# EAGLE board CT_schematic (EAGLE 7.6.0)

Size 100 x 80 mm. Coordinates in mm from the lower left corner, seen from the top.
Outline: 0,0 100,0 100,80 0,80 0,0
Copper layers (1*16): Top 0.035mm / dielectric 1.5mm / Bottom 0.035mm
Design rules "default": minimum track width 10mil, minimum drill 24mil, track to track 8mil, track to pad 8mil, pad to pad 8mil, via to via 8mil, smd to smd 8mil, copper to edge 40mil, drill to drill 8mil, minimum pad ring 10mil, minimum via ring 8mil, stop-mask expansion 4mil, vias tented up to drill 0mil, thermal gap 10mil

## Footprints (pad centres in the part's own frame; a part is rotated, then mirrored left to right if it is on the bottom)
C0603 = smd 0.8 x 0.8: 1 -0.762,0; 2 0.762,0
C0402 = smd 0.5 x 0.5: 1 -0.508,0; 2 0.508,0
C0805 = smd 1.2 x 1.3: 1 -1.016,0; 2 1.016,0
C1210 = smd 1.2 x 2.5: 1 -1.524,0; 2 1.524,0
EXV-9H = smd 3.505 x 1.676: 1 -2.857,0; 2 2.857,0
L0603 = smd 0.8 x 0.8: 1 -0.762,0; 2 0.762,0
PJ-037B_PACKAGE = drill 3.7 square: 1 12,0 | drill 3.2 square: 2 6,0
R0603 = smd 0.8 x 0.8: 1 -0.762,0; 2 0.762,0
LQFP176 = smd 0.3 x 1.2: 1 -10.75,-12.75; 2 -10.25,-12.75; 3 -9.75,-12.75; 4 -9.25,-12.75; 5 -8.75,-12.75; 6 -8.25,-12.75; 7 -7.75,-12.75; 8 -7.25,-12.75; 9 -6.75,-12.75; 10 -6.25,-12.75; 11 -5.75,-12.75; 12 -5.25,-12.75; 13 -4.75,-12.75; 14 -4.25,-12.75; 15 -3.75,-12.75; 16 -3.25,-12.75; 17 -2.75,-12.75; 18 -2.25,-12.75; 19 -1.75,-12.75; 20 -1.25,-12.75; 21 -0.75,-12.75; 22 -0.25,-12.75; 23 0.25,-12.75; 24 0.75,-12.75; 25 1.25,-12.75; 26 1.75,-12.75; 27 2.25,-12.75; 28 2.75,-12.75; 29 3.25,-12.75; 30 3.75,-12.75; 31 4.25,-12.75; 32 4.75,-12.75; 33 5.25,-12.75; 34 5.75,-12.75; 35 6.25,-12.75; 36 6.75,-12.75; 37 7.25,-12.75; 38 7.75,-12.75; 39 8.25,-12.75; 40 8.75,-12.75; 41 9.25,-12.75; 42 9.75,-12.75; 43 10.25,-12.75; 44 10.75,-12.75; 89 10.75,12.75; 90 10.25,12.75; 91 9.75,12.75; 92 9.25,12.75; 93 8.75,12.75; 94 8.25,12.75; 95 7.75,12.75; 96 7.25,12.75; 97 6.75,12.75; 98 6.25,12.75; 99 5.75,12.75; 100 5.25,12.75; 101 4.75,12.75; 102 4.25,12.75; 103 3.75,12.75; 104 3.25,12.75; 105 2.75,12.75; 106 2.25,12.75; 107 1.75,12.75; 108 1.25,12.75; 109 0.75,12.75; 110 0.25,12.75; 111 -0.25,12.75; 112 -0.75,12.75; 113 -1.25,12.75; 114 -1.75,12.75; 115 -2.25,12.75; 116 -2.75,12.75; 117 -3.25,12.75; 118 -3.75,12.75; 119 -4.25,12.75; 120 -4.75,12.75; 121 -5.25,12.75; 122 -5.75,12.75; 123 -6.25,12.75; 124 -6.75,12.75; 125 -7.25,12.75; 126 -7.75,12.75; 127 -8.25,12.75; 128 -8.75,12.75; 129 -9.25,12.75; 130 -9.75,12.75; 131 -10.25,12.75; 132 -10.75,12.75 | smd 1.2 x 0.3: 45 12.75,-10.75; 46 12.75,-10.25; 47 12.75,-9.75; 48 12.75,-9.25; 49 12.75,-8.75; 50 12.75,-8.25; 51 12.75,-7.75; 52 12.75,-7.25; 53 12.75,-6.75; 54 12.75,-6.25; 55 12.75,-5.75; 56 12.75,-5.25; 57 12.75,-4.75; 58 12.75,-4.25; 59 12.75,-3.75; 60 12.75,-3.25; 61 12.75,-2.75; 62 12.75,-2.25; 63 12.75,-1.75; 64 12.75,-1.25; 65 12.75,-0.75; 66 12.75,-0.25; 67 12.75,0.25; 68 12.75,0.75; 69 12.75,1.25; 70 12.75,1.75; 71 12.75,2.25; 72 12.75,2.75; 73 12.75,3.25; 74 12.75,3.75; 75 12.75,4.25; 76 12.75,4.75; 77 12.75,5.25; 78 12.75,5.75; 79 12.75,6.25; 80 12.75,6.75; 81 12.75,7.25; 82 12.75,7.75; 83 12.75,8.25; 84 12.75,8.75; 85 12.75,9.25; 86 12.75,9.75; 87 12.75,10.25; 88 12.75,10.75; 133 -12.75,10.75; 134 -12.75,10.25; 135 -12.75,9.75; 136 -12.75,9.25; 137 -12.75,8.75; 138 -12.75,8.25; 139 -12.75,7.75; 140 -12.75,7.25; 141 -12.75,6.75; 142 -12.75,6.25; 143 -12.75,5.75; 144 -12.75,5.25; 145 -12.75,4.75; 146 -12.75,4.25; 147 -12.75,3.75; 148 -12.75,3.25; 149 -12.75,2.75; 150 -12.75,2.25; 151 -12.75,1.75; 152 -12.75,1.25; 153 -12.75,0.75; 154 -12.75,0.25; 155 -12.75,-0.25; 156 -12.75,-0.75; 157 -12.75,-1.25; 158 -12.75,-1.75; 159 -12.75,-2.25; 160 -12.75,-2.75; 161 -12.75,-3.25; 162 -12.75,-3.75; 163 -12.75,-4.25; 164 -12.75,-4.75; 165 -12.75,-5.25; 166 -12.75,-5.75; 167 -12.75,-6.25; 168 -12.75,-6.75; 169 -12.75,-7.25; 170 -12.75,-7.75; 171 -12.75,-8.25; 172 -12.75,-8.75; 173 -12.75,-9.25; 174 -12.75,-9.75; 175 -12.75,-10.25; 176 -12.75,-10.75
10100565 = smd 0.8 x 2.35: 1 0,0; 2 1.25,0; 3 2.55,0; 4 4.25,0; 5 5.43,0; 6 6.68,0; 7 7.93,0; 8 9.18,0; 9 11.67,0; 10 14.18,0; 11 15.43,0; 12 16.68,0; 13 17.93,0; 14 19.18,0; 15 21.68,0 | smd 1.5 x 3.1: 16 23.495,-1.375; 20 25.685,-22.875 | smd 1.55 x 3.1: 17 -1.815,-1.375; 21 -1.815,-22.875 | drill 1.1 pad 1.1: 18 21.68,-2.375; 19 0.68,-2.375
HTQFP-64-EXP = smd 1.5 x 0.3: 1 -5.7,3.75; 2 -5.7,3.25; 3 -5.7,2.75; 4 -5.7,2.25; 5 -5.7,1.75; 6 -5.7,1.25; 7 -5.7,0.75; 8 -5.7,0.25; 9 -5.7,-0.25; 10 -5.7,-0.75; 11 -5.7,-1.25; 12 -5.7,-1.75; 13 -5.7,-2.25; 14 -5.7,-2.75; 15 -5.7,-3.25; 16 -5.7,-3.75; 33 5.7,-3.75; 34 5.7,-3.25; 35 5.7,-2.75; 36 5.7,-2.25; 37 5.7,-1.75; 38 5.7,-1.25; 39 5.7,-0.75; 40 5.7,-0.25; 41 5.7,0.25; 42 5.7,0.75; 43 5.7,1.25; 44 5.7,1.75; 45 5.7,2.25; 46 5.7,2.75; 47 5.7,3.25; 48 5.7,3.75 | smd 0.3 x 1.5: 17 -3.75,-5.7; 18 -3.25,-5.7; 19 -2.75,-5.7; 20 -2.25,-5.7; 21 -1.75,-5.7; 22 -1.25,-5.7; 23 -0.75,-5.7; 24 -0.25,-5.7; 25 0.25,-5.7; 26 0.75,-5.7; 27 1.25,-5.7; 28 1.75,-5.7; 29 2.25,-5.7; 30 2.75,-5.7; 31 3.25,-5.7; 32 3.75,-5.7; 49 3.75,5.7; 50 3.25,5.7; 51 2.75,5.7; 52 2.25,5.7; 53 1.75,5.7; 54 1.25,5.7; 55 0.75,5.7; 56 0.25,5.7; 57 -0.25,5.7; 58 -0.75,5.7; 59 -1.25,5.7; 60 -1.75,5.7; 61 -2.25,5.7; 62 -2.75,5.7; 63 -3.25,5.7; 64 -3.75,5.7 | smd 8 x 8: EXP 0,0 | drill 0.2 pad 0.3: P$9 3.25,3.25; P$10 1.95,3.25; P$11 0.65,3.25; P$12 -0.65,3.25; P$13 -1.95,3.25; P$14 -3.25,3.25; P$15 -3.25,1.95; P$16 -1.95,1.95; P$17 -0.65,1.95; P$18 0.65,1.95; P$19 1.95,1.95; P$20 3.25,1.95; P$24 3.25,0.65; P$25 3.25,-0.65; P$26 1.95,0.65; P$27 1.95,-0.65; P$28 0.65,0.65; P$29 0.65,-0.65; P$30 -0.65,0.65; P$31 -0.65,-0.65; P$32 -1.95,0.65; P$33 -1.95,-0.65; P$34 -3.25,0.65; P$35 -3.25,-0.65; P$36 -3.25,-1.95; P$37 -1.95,-1.95; P$38 -0.65,-1.95; P$39 0.65,-1.95; P$40 1.95,-1.95; P$41 3.25,-1.95; P$44 3.25,-3.25; P$45 1.95,-3.25; P$46 0.65,-3.25; P$47 -0.65,-3.25; P$48 -1.95,-3.25; P$49 -3.25,-3.25
7499511611A = drill 0.9: 1 -5.075,-15.24; 2 -3.045,-15.24; 3 -1.015,-15.24; 4 1.015,-15.24; 5 3.045,-15.24; 6 5.075,-15.24; 7 -6.09,-17.78; 8 -4.06,-17.78; 9 -2.03,-17.78; 10 2.03,-17.78; 11 4.06,-17.78; 12 6.09,-17.78; 13 -5.59,-8.12; 14 5.59,-8.12; 15 -5.59,-6.66; 16 5.59,-6.66 | drill 1.02: 17 -6.095,-20.32; 18 -3.555,-20.32; 19 3.555,-20.32; 20 6.095,-20.32 | drill 1.57: Z1 -8.065,3.18; Z2 8.065,3.18 | hole 3: -6.35,0; 6.35,0
SOT-23-8 = smd 0.4 x 1.2: 1 -0.975,-1.3; 2 -0.325,-1.3; 3 0.325,-1.3; 4 0.975,-1.3; 5 0.975,1.3; 6 0.325,1.3; 7 -0.325,1.3; 8 -0.975,1.3
182-009-MALE = drill 1.194 pad 1.524 octagon: 1 -5.537,10.923; 2 -2.769,10.923; 3 0,10.923; 4 2.769,10.923; 5 5.537,10.923; 6 -4.153,8.08; 7 -1.384,8.08; 8 1.384,8.08; 9 4.153,8.08 | hole 3.048: -12.446,9.501; 12.446,9.501
QFN-28 = smd 0.813 x 0.305: 1 -2.451,1.5; 2 -2.451,1; 3 -2.451,0.5; 4 -2.451,0; 5 -2.451,-0.5; 6 -2.451,-1; 7 -2.451,-1.5; 15 2.451,-1.5; 16 2.451,-1; 17 2.451,-0.5; 18 2.451,0; 19 2.451,0.5; 20 2.451,1; 21 2.451,1.5 | smd 0.305 x 0.813: 8 -1.5,-2.451; 9 -1,-2.451; 10 -0.5,-2.451; 11 0,-2.451; 12 0.5,-2.451; 13 1,-2.451; 14 1.5,-2.451; 22 1.5,2.451; 23 1,2.451; 24 0.5,2.451; 25 0,2.451; 26 -0.5,2.451; 27 -1,2.451; 28 -1.5,2.451 | smd 3.607 x 3.607: 29 0,0
SJ-43515TS-SMT-TR = smd 2.2 x 3: 1 0.6,-7.4; 4 3.4,-7.4 | smd 3 x 3: 2 12.8,-7.4; 5 17,-3 | smd 2 x 3: 3 5.3,0; 6 2.5,0 | drill 1.8: P$7 4.5,-3.69; P$8 11.54,-3.69
ABLS-25.000MHZ-B2F-T = smd 5.6 x 2.8: 1 -3.81,0; 2 5.69,0
ASEK = smd 1.4 x 1: 1 -1.1,-0.8; 2 1.1,-0.8; 3 1.1,0.8; 4 -1.1,0.8
ASFL1 = smd 1.7 x 1.5: 1 -1.27,-1.1; 2 1.27,-1.1; 3 1.27,1.1; 4 -1.27,1.1
WSON-8 = smd 0.3 x 0.6: 1 -0.75,0; 2 0.05,0; 3 0.85,0; 4 1.65,0; 5 1.65,3.8; 6 0.85,3.8; 7 0.05,3.8; 8 -0.75,3.8 | smd 3 x 2.6: PAD 0.45,1.9
SON-6 = smd 0.55 x 0.3: 1 -0.355,0.5 | smd 0.52 x 0.3: 2 -0.37,0; 3 -0.37,-0.5; 4 0.37,-0.5; 5 0.37,0; 6 0.37,0.5
SW_4-1437565-2 = smd 1.4 x 2.1: 1 -2.23,4.55; 2 -2.23,-4.55; 3 2.23,4.55; 4 2.23,-4.55
LGM67K-G1J2-24-Z = smd 0.8 x 1.4: A -2,0; C 0,0
NC7SZ125M5X = smd 1.3 x 0.7: 1 -1.3,0.95; 2 -1.3,0; 3 -1.3,-0.95; 4 1.3,-0.95; 5 1.3,0.95

## Placement (x,y rotation side)
C1  1e-06  [C0603]  -40.64,113.03 0 top  (outside the outline)
C2  1e-07  [C0603]  -44.45,113.03 0 top  (outside the outline)
C3  1e-07  [C0603]  -48.26,113.03 0 top  (outside the outline)
C4  1e-07  [C0603]  -52.07,113.03 0 top  (outside the outline)
C5  1e-07  [C0603]  -55.88,113.03 0 top  (outside the outline)
C6  1e-07  [C0603]  -59.69,113.03 0 top  (outside the outline)
C7  1e-07  [C0603]  -63.5,113.03 0 top  (outside the outline)
C8  1e-07  [C0603]  -67.31,113.03 0 top  (outside the outline)
C9  1e-07  [C0603]  -71.12,113.03 0 top  (outside the outline)
C10  1e-07  [C0603]  -74.93,113.03 0 top  (outside the outline)
C11  1e-07  [C0603]  -78.74,113.03 0 top  (outside the outline)
C12  1e-07  [C0603]  -82.55,113.03 0 top  (outside the outline)
C13  1e-07  [C0603]  -86.36,113.03 0 top  (outside the outline)
C14  1e-07  [C0603]  -90.17,113.03 0 top  (outside the outline)
C15  1e-07  [C0603]  -93.98,113.03 0 top  (outside the outline)
C16  1e-07  [C0603]  -97.79,113.03 0 top  (outside the outline)
C17  1e-07  [C0603]  -101.6,113.03 0 top  (outside the outline)
C18  4.7e-06  [C0603]  -29.21,113.03 0 top  (outside the outline)
C19  2.2e-06  [C0603]  -33.02,113.03 0 top  (outside the outline)
C20  2.2e-06  [C0603]  -36.83,113.03 0 top  (outside the outline)
C21  1e-07  [C0603]  -105.41,113.03 0 top  (outside the outline)
C22  1e-07  [C0603]  -109.22,113.03 0 top  (outside the outline)
C23  1e-08  [C0603]  -15.24,118.11 0 top  (outside the outline)
C24  1e-06  [C0603]  -19.05,118.11 0 top  (outside the outline)
C25  1e-11  [C0402]  -66.04,123.19 0 top  (outside the outline)
C26  1e-11  [C0402]  -69.85,123.19 0 top  (outside the outline)
C27  1e-07  [C0402]  -73.66,123.19 0 top  (outside the outline)
C28  1e-05  [C0805]  -91.44,95.25 0 top  (outside the outline)
C29  1e-07  [C0402]  -77.47,123.19 0 top  (outside the outline)
C30  1e-06  [C0603]  -22.86,118.11 0 top  (outside the outline)
C31  1e-07  [C0402]  -81.28,123.19 0 top  (outside the outline)
C32  1e-06  [C0603]  -26.67,118.11 0 top  (outside the outline)
C33  1e-07  [C0402]  -85.09,123.19 0 top  (outside the outline)
C34  1e-06  [C0603]  -30.48,118.11 0 top  (outside the outline)
C35  1e-07  [C0402]  -88.9,123.19 0 top  (outside the outline)
C36  1e-05  [C0805]  -96.52,95.25 0 top  (outside the outline)
C37  1e-08  [C0402]  -92.71,123.19 0 top  (outside the outline)
C38  1e-06  [C0603]  -34.29,118.11 0 top  (outside the outline)
C39  1e-07  [C0402]  -96.52,123.19 0 top  (outside the outline)
C40  1e-06  [C0603]  -38.1,118.11 0 top  (outside the outline)
C41  1e-07  [C0402]  -100.33,123.19 0 top  (outside the outline)
C42  1e-05  [C0805]  -101.6,95.25 0 top  (outside the outline)
C43  1e-08  [C0402]  -104.14,123.19 0 top  (outside the outline)
C44  1e-06  [C0603]  -41.91,118.11 0 top  (outside the outline)
C45  1e-07  [C0402]  -107.95,123.19 0 top  (outside the outline)
C46  1e-06  [C0603]  -45.72,118.11 0 top  (outside the outline)
C47  1e-07  [C0402]  -15.24,128.27 0 top  (outside the outline)
C48  1e-06  [C0603]  -49.53,118.11 0 top  (outside the outline)
C49  1e-07  [C0402]  -19.05,128.27 0 top  (outside the outline)
C50  1e-06  [C0603]  -53.34,118.11 0 top  (outside the outline)
C51  1e-07  [C0402]  -22.86,128.27 0 top  (outside the outline)
C52  1e-05  [C0805]  -106.68,95.25 0 top  (outside the outline)
C53  1e-08  [C0402]  -26.67,128.27 0 top  (outside the outline)
C54  1e-06  [C0603]  -57.15,118.11 0 top  (outside the outline)
C55  1e-07  [C0402]  -30.48,128.27 0 top  (outside the outline)
C56  1e-06  [C0603]  -60.96,118.11 0 top  (outside the outline)
C57  1e-07  [C0402]  -34.29,128.27 0 top  (outside the outline)
C58  1e-05  [C0805]  -15.24,102.87 0 top  (outside the outline)
C59  1e-08  [C0402]  -38.1,128.27 0 top  (outside the outline)
C60  2.7e-11  [C0402]  -58.42,123.19 0 top  (outside the outline)
C61  2.7e-11  [C0402]  -62.23,123.19 0 top  (outside the outline)
C62  1e-07  [C0402]  -41.91,128.27 0 top  (outside the outline)
C63  2.2e-05  [C1210]  -24.13,96.52 0 top  (outside the outline)
C64  2.2e-05  [C1210]  -30.48,96.52 0 top  (outside the outline)
C65  1e-09  [C0402]  -45.72,128.27 0 top  (outside the outline)
C66  1e-09  [C0402]  -49.53,128.27 0 top  (outside the outline)
C67  1e-07  [C0402]  -53.34,128.27 0 top  (outside the outline)
C68  1e-07  [C0402]  -57.15,128.27 0 top  (outside the outline)
C69  1e-07  [C0402]  -60.96,128.27 0 top  (outside the outline)
C70  1e-07  [C0402]  -64.77,128.27 0 top  (outside the outline)
C71  1e-07  [C0402]  -68.58,128.27 0 top  (outside the outline)
C72  1e-05  [C0805]  -20.32,102.87 0 top  (outside the outline)
C73  1e-05  [C0805]  -25.4,102.87 0 top  (outside the outline)
C74  1e-05  [C0805]  -30.48,102.87 0 top  (outside the outline)
C75  1e-05  [C0805]  -35.56,102.87 0 top  (outside the outline)
C76  1e-05  [C0805]  -40.64,102.87 0 top  (outside the outline)
C77  1e-08  [C0402]  -72.39,128.27 0 top  (outside the outline)
C78  1e-08  [C0402]  -76.2,128.27 0 top  (outside the outline)
C79  1e-08  [C0402]  -80.01,128.27 0 top  (outside the outline)
C80  1e-05  [C1210]  -36.83,96.52 0 top  (outside the outline)
C81  1e-05  [C0805]  -45.72,102.87 0 top  (outside the outline)
C82  1e-08  [C0402]  -83.82,128.27 0 top  (outside the outline)
C83  1e-05  [C1210]  -43.18,96.52 0 top  (outside the outline)
C84  1e-05  [C0805]  -50.8,102.87 0 top  (outside the outline)
C85  1e-08  [C0402]  -87.63,128.27 0 top  (outside the outline)
C86  1e-05  [C1210]  -49.53,96.52 0 top  (outside the outline)
C87  1e-05  [C1210]  -55.88,96.52 0 top  (outside the outline)
C88  1e-08  [C0402]  -91.44,128.27 0 top  (outside the outline)
C89  1e-05  [C1210]  -62.23,96.52 0 top  (outside the outline)
C90  1e-05  [C1210]  -68.58,96.52 0 top  (outside the outline)
C91  1e-07  [C0402]  -95.25,128.27 0 top  (outside the outline)
C92  0.0001  [EXV-9H]  -38.1,88.9 0 top  (outside the outline)
C93  0.0001  [EXV-9H]  -49.53,88.9 0 top  (outside the outline)
C94  1e-08  [C0402]  -99.06,128.27 0 top  (outside the outline)
C95  1e-08  [C0402]  -102.87,128.27 0 top  (outside the outline)
F1  240.0  [L0603]  -64.77,118.11 0 top  (outside the outline)
J1  PJ-037B  [PJ-037B_PACKAGE]  -55.88,67.31 0 top  (outside the outline)
R2  1000.0  [R0603]  -68.58,118.11 0 top  (outside the outline)
R4  4700.0  [R0603]  -72.39,118.11 0 top  (outside the outline)
R5  4700.0  [R0603]  -76.2,118.11 0 top  (outside the outline)
R6  2200.0  [R0603]  -80.01,118.11 0 top  (outside the outline)
R7  2200.0  [R0603]  -83.82,118.11 0 top  (outside the outline)
R8  10000.0  [R0603]  -45.72,107.95 0 top  (outside the outline)
R9  10000.0  [R0603]  -50.8,107.95 0 top  (outside the outline)
R10  100000.0  [R0603]  -55.88,101.6 0 top  (outside the outline)
R11  100000.0  [R0603]  -60.96,101.6 0 top  (outside the outline)
R12  100000.0  [R0603]  -66.04,101.6 0 top  (outside the outline)
R13  100000.0  [R0603]  -71.12,101.6 0 top  (outside the outline)
R14  100000.0  [R0603]  -76.2,101.6 0 top  (outside the outline)
R15  100000.0  [R0603]  -81.28,101.6 0 top  (outside the outline)
R16  100000.0  [R0603]  -86.36,101.6 0 top  (outside the outline)
R17  100000.0  [R0603]  -91.44,101.6 0 top  (outside the outline)
R18  100000.0  [R0603]  -96.52,101.6 0 top  (outside the outline)
R19  100000.0  [R0603]  -101.6,101.6 0 top  (outside the outline)
R20  100000.0  [R0603]  -106.68,101.6 0 top  (outside the outline)
R21  200.0  [R0603]  -87.63,118.11 0 top  (outside the outline)
R22  200.0  [R0603]  -91.44,118.11 0 top  (outside the outline)
R23  10000.0  [R0603]  -55.88,107.95 0 top  (outside the outline)
R24  11000.0  [R0603]  -60.96,107.95 0 top  (outside the outline)
R25  10000.0  [R0603]  -66.04,107.95 0 top  (outside the outline)
R26  10000.0  [R0603]  -71.12,107.95 0 top  (outside the outline)
R27  10000.0  [R0603]  -76.2,107.95 0 top  (outside the outline)
R28  10000.0  [R0603]  -81.28,107.95 0 top  (outside the outline)
R29  10000.0  [R0603]  -86.36,107.95 0 top  (outside the outline)
R30  10000.0  [R0603]  -91.44,107.95 0 top  (outside the outline)
R31  10000.0  [R0603]  -96.52,107.95 0 top  (outside the outline)
R32  5760.0  [R0603]  -95.25,118.11 0 top  (outside the outline)
R33  2490.0  [R0603]  -99.06,118.11 0 top  (outside the outline)
R34  5760.0  [R0603]  -102.87,118.11 0 top  (outside the outline)
R35  2490.0  [R0603]  -106.68,118.11 0 top  (outside the outline)
R36  120.0  [R0603]  -15.24,123.19 0 top  (outside the outline)
R37  47000.0  [R0603]  -101.6,107.95 0 top  (outside the outline)
R38  47000.0  [R0603]  -106.68,107.95 0 top  (outside the outline)
R39  47000.0  [R0603]  -15.24,113.03 0 top  (outside the outline)
R40  680.0  [R0603]  -19.05,123.19 0 top  (outside the outline)
R41  100000.0  [R0603]  -15.24,107.95 0 top  (outside the outline)
R42  100.0  [R0603]  -22.86,123.19 0 top  (outside the outline)
R43  1000.0  [R0603]  -26.67,123.19 0 top  (outside the outline)
R44  100000.0  [R0603]  -20.32,107.95 0 top  (outside the outline)
R45  806.0  [R0603]  -30.48,123.19 0 top  (outside the outline)
R46  1000.0  [R0603]  -34.29,123.19 0 top  (outside the outline)
R47  100000.0  [R0603]  -25.4,107.95 0 top  (outside the outline)
R48  1500.0  [R0603]  -38.1,123.19 0 top  (outside the outline)
R49  1000.0  [R0603]  -41.91,123.19 0 top  (outside the outline)
R50  100000.0  [R0603]  -30.48,107.95 0 top  (outside the outline)
R51  2231.0  [R0603]  -45.72,123.19 0 top  (outside the outline)
R52  1000.0  [R0603]  -49.53,123.19 0 top  (outside the outline)
R53  10000.0  [R0603]  -20.32,113.03 0 top  (outside the outline)
R54  10000.0  [R0603]  -25.4,113.03 0 top  (outside the outline)
R55  9100.0  [R0603]  -53.34,123.19 0 top  (outside the outline)
R56  680000.0  [R0603]  -35.56,107.95 0 top  (outside the outline)
R57  120000.0  [R0603]  -40.64,107.95 0 top  (outside the outline)
U1  STM32F407IGT6  [LQFP176]  -76.2,13.97 0 top  (outside the outline)
U2  10100565  [10100565]  -59.69,25.4 0 top  (outside the outline)
U3  DP83867IRPAPT  [HTQFP-64-EXP]  -60.96,46.99 0 top  (outside the outline)
U4  7499511611A  [7499511611A]  -22.86,25.4 0 top  (outside the outline)
U5  MAX3051EKA+T  [SOT-23-8]  -73.66,95.25 0 top  (outside the outline)
U6  182-009-113R531  [182-009-MALE]  -36.83,44.45 0 top  (outside the outline)
U7  WM8731CLSEFL  [QFN-28]  -16.51,96.52 0 top  (outside the outline)
U8  SJ-43515TS-SMT-TR  [SJ-43515TS-SMT-TR]  -93.98,48.26 0 top  (outside the outline)
U9  SJ-43515TS-SMT-TR  [SJ-43515TS-SMT-TR]  -39.37,69.85 0 top  (outside the outline)
U10  ABLS-25.000MHZ-B2F-T  [ABLS-25.000MHZ-B2F-T]  -68.58,88.9 0 top  (outside the outline)
U11  ABLS-25.000MHZ-B2F-T  [ABLS-25.000MHZ-B2F-T]  -88.9,88.9 0 top  (outside the outline)
U12  ASEK-32.768KHz-ECST  [ASEK]  -29.21,88.9 0 top  (outside the outline)
U13  ASFL1-12.288MHZ-EC-T  [ASFL1]  -91.44,80.01 0 top  (outside the outline)
U14  LP3878SDX-ADJ/NOPB  [WSON-8]  -93.98,63.5 0 top  (outside the outline)
U15  LP3878SDX-ADJ/NOPB  [WSON-8]  -30.48,77.47 0 top  (outside the outline)
U16  LP3878SDX-ADJ/NOPB  [WSON-8]  -50.8,77.47 0 top  (outside the outline)
U17  LP3878SDX-ADJ/NOPB  [WSON-8]  -71.12,77.47 0 top  (outside the outline)
U18  TPS3895ADRYR  [SON-6]  -105.41,127 0 top  (outside the outline)
U19  4-1437565-2  [SW_4-1437565-2]  -72.39,66.04 0 top  (outside the outline)
U20  Q65110A2395  [LGM67K-G1J2-24-Z]  -100.33,87.63 0 top  (outside the outline)
U21  nc7sz125m5x  [NC7SZ125M5X]  -78.74,95.25 0 top  (outside the outline)
U22  nc7sz125m5x  [NC7SZ125M5X]  -85.09,95.25 0 top  (outside the outline)

## Library data of the parts
C1-C95 F1 J1 R2 R4-R57 U1-U22 = circuit_tree

## Nets
CLK_CRYSTAL_U1_29: C25.1 U1.29 U10.1
CLK_CRYSTAL_U1_30: C26.1 U1.30 U10.2
CLK_CRYSTAL_U3_18: C60.1 U3.18 U11.2
CLK_CRYSTAL_U3_19: C61.1 U3.19 U11.1
CLK_U1_9: U1.9 U12.3
CLK_U7_1: U7.1 U13.3
GND: C1.2 C2.2 C3.2 C4.2 C5.2 C6.2 C7.2 C8.2 C9.2 C10.2 C11.2 C12.2 C13.2 C14.2 C15.2 C16.2 C17.2 C18.2 C19.2 C20.2 C21.2 C22.2 C23.2 C24.2 C25.2 C26.2 C27.2 C28.2 C29.2 C30.2 C31.2 C32.2 C33.2 C34.2 C35.2 C36.2 C37.2 C38.2 C39.2 C40.2 C41.2 C42.2 C43.2 C44.2 C45.2 C46.2 C47.2 C48.2 C49.2 C50.2 C51.2 C52.2 C53.2 C54.2 C55.2 C56.2 C57.2 C58.2 C59.2 C60.2 C61.2 C62.2 C66.2 C67.2 C68.2 C69.2 C70.2 C71.2 C72.2 C73.2 C74.2 C75.2 C76.2 C77.2 C78.2 C79.2 C80.2 C81.2 C82.2 C83.2 C84.2 C85.2 C86.2 C87.2 C88.2 C89.2 C90.2 C91.2 C92.2 C93.2 C94.2 C95.2 J1.2 R2.2 R8.2 R24.2 R25.2 R26.2 R27.2 R28.2 R29.2 R30.2 R31.2 R33.2 R35.2 R37.2 R38.2 R39.2 R43.2 R46.2 R49.2 R52.2 R55.2 R57.2 U1.14 U1.22 U1.37 U1.48 U1.61 U1.71 U1.90 U1.102 U1.113 U1.126 U1.135 U1.148 U1.158 U2.6 U2.10 U2.12 U2.16 U2.17 U2.20 U2.21 U3.EXP U4.17 U4.20 U4.Z1 U4.Z2 U5.2 U5.8 U6.5 U7.4 U7.15 U7.19 U7.25 U7.26 U7.29 U8.1 U9.1 U12.2 U13.2 U14.3 U14.PAD U15.3 U15.PAD U16.3 U16.PAD U17.3 U17.PAD U18.2 U20.C U21.1 U21.3 U22.1 U22.3
NET_U1_31: R5.1 U1.31 U22.4
NET_U1_33: R6.1 U1.33 U3.20
NET_U1_39: C21.1 C22.1 C23.1 C24.1 F1.1 U1.38 U1.39
NET_U1_42: R7.1 U1.42 U3.21
NET_U1_81: C19.1 U1.81
NET_U1_125: C20.1 U1.125
NET_U1_166: R8.1 U1.166
NET_U1_171: R9.1 U1.171
NET_U1_175: U20.A
NET_U1_176: U19.3 U19.4
NET_U2_1: R12.1 U2.1
NET_U2_2: R11.1 U2.2
NET_U2_18: U2.18 U2.19
NET_U3_15: R24.1 U3.15
NET_U3_24: R30.1 U3.24
NET_U3_25: R31.1 U3.25
NET_U3_31: R26.1 U3.31
NET_U3_32: R27.1 U3.32
NET_U3_33: R28.1 U3.33
NET_U3_34: R29.1 U3.34
NET_U3_40: R25.1 U3.40
NET_U3_48: R34.1 R35.1 U3.48
NET_U3_59: R4.1 U3.59 U21.4
NET_U3_60: R23.1 U3.60
NET_U4_1: U4.1
NET_U4_2: U3.11 U4.2
NET_U4_3: U3.10 U4.3
NET_U4_4: U3.5 U4.4
NET_U4_5: U3.6 U4.5
NET_U4_6: C29.1 U4.1 U4.6 U4.7 U4.12
NET_U4_7: U4.7
NET_U4_8: U3.13 U4.8
NET_U4_9: U3.14 U4.9
NET_U4_10: U3.3 U4.10
NET_U4_11: U3.2 U4.11
NET_U4_18: R21.1 U4.18
NET_U4_19: R22.1 U4.19
NET_U4_61: R22.2
NET_U4_63: R21.2
NET_U5_6: R36.2 U5.6
NET_U6_2: R36.2 U5.6 U6.2
NET_U6_3: R36.1 U5.7 U6.3
NET_U7_9: U7.9
NET_U7_20: C71.1 C76.1 U7.20
NET_U8_2: C64.1 R38.1 U8.2
NET_U8_5: C63.1 R37.1 U8.5
NET_U8_13: C63.2
NET_U8_14: C64.2
NET_U9_5: C65.1 C66.1 R39.1 R40.1 U9.5
NET_U9_21: R40.2
NET_U9_22: C65.2
NET_U14_1: C79.1 U14.1
NET_U14_6: R42.2 R43.1 U14.6
NET_U14_8: R41.1 U14.8
NET_U15_1: C82.1 U15.1
NET_U15_6: R45.2 R46.1 U15.6
NET_U15_8: R44.1 U15.8
NET_U16_1: C85.1 U16.1
NET_U16_6: R48.2 R49.1 U16.6
NET_U16_8: R47.1 U16.8
NET_U17_1: C88.1 U17.1
NET_U17_6: R51.2 R52.1 U17.6
NET_U17_8: R50.1 U17.8
NET_U18_1: R54.1 R55.1 U18.1
NET_U18_3: R56.2 R57.1 U18.3
NET_U18_4: R53.1 U18.4 U21.2 U22.2
NET_U19_1: R2.1 U19.1 U19.2
PROC_CAN1_RX: U1.11 U5.4
PROC_CAN1_TX: U1.123 U5.1
PROC_ETH_COL: U1.44 U3.55
PROC_ETH_CRS: U1.40 U3.56
PROC_ETH_RX_CLK: U1.41 U3.43
PROC_ETH_RX_DV: U1.53 U3.53
PROC_ETH_RX_ER: U1.12 U3.54
PROC_ETH_RXD0: R32.1 R33.1 U1.54 U3.44
PROC_ETH_RXD1: U1.55 U3.45
PROC_ETH_RXD2: U1.56 U3.46
PROC_ETH_RXD3: U1.57 U3.47
PROC_ETH_TX_CLK: U1.35 U3.30
PROC_ETH_TX_EN: U1.80 U3.52
PROC_ETH_TXD0: U1.92 U3.38
PROC_ETH_TXD1: U1.93 U3.37
PROC_ETH_TXD2: U1.34 U3.36
PROC_ETH_TXD3: U1.1 U3.35
PROC_I2S2_CK: U1.79 U7.7
PROC_I2S2_EXT_SD: U1.94 U7.10
PROC_I2S2_SD: U1.95 U7.8
PROC_I2S2_WS: U1.131 U7.9 U7.11
PROC_SDIO_CK: R10.1 U1.141 U2.8
PROC_SDIO_D0: R13.1 U1.117 U2.4
PROC_SDIO_D1: R14.1 U1.118 U2.3
PROC_SDIO_D2: R15.1 U1.139 U2.15
PROC_SDIO_D3: R16.1 U1.140 U2.14
PROC_SDIO_D4: R17.1 U1.167 U2.13
PROC_SDIO_D5: R18.1 U1.168 U2.11
PROC_SDIO_D6: R19.1 U1.115 U2.7
PROC_SDIO_D7: R20.1 U1.116 U2.5
VCC_S1_12V3: C80.1 C83.1 C86.1 C89.1 C92.1 C93.1 J1.1 R41.2 R44.2 R47.2 R50.2 U14.4 U15.4 U16.4 U17.4
VCC_TIER1_1V1: C44.1 C45.1 C46.1 C47.1 C48.1 C49.1 C50.1 C51.1 C52.1 C53.1 C81.1 R42.1 U3.8 U3.29 U3.42 U3.58 U14.5
VCC_TIER1_1V8: C27.1 C28.1 C54.1 C55.1 C56.1 C57.1 C58.1 C59.1 C67.1 C69.1 C70.1 C72.1 C74.1 C75.1 C84.1 C94.1 C95.1 R10.2 R11.2 R12.2 R13.2 R14.2 R15.2 R16.2 R17.2 R18.2 R19.2 R20.2 R45.1 U2.9 U3.17 U3.64 U7.5 U7.12 U7.18 U15.5 U21.5 U22.5
VCC_TIER1_2V5: C38.1 C39.1 C40.1 C41.1 C42.1 C43.1 C87.1 R48.1 U3.4 U3.12 U16.5
VCC_TIER1_3V3: C1.1 C2.1 C3.1 C4.1 C5.1 C6.1 C7.1 C8.1 C9.1 C10.1 C11.1 C12.1 C13.1 C14.1 C15.1 C16.1 C17.1 C18.1 C30.1 C31.1 C32.1 C33.1 C34.1 C35.1 C36.1 C37.1 C62.1 C68.1 C73.1 C77.1 C78.1 C90.1 C91.1 F1.2 R4.2 R5.2 R6.2 R7.2 R9.2 R23.2 R32.2 R34.2 R51.1 R53.2 R54.2 R56.1 U1.6 U1.15 U1.23 U1.36 U1.49 U1.62 U1.72 U1.82 U1.91 U1.103 U1.114 U1.127 U1.136 U1.149 U1.159 U1.172 U3.23 U3.41 U3.57 U5.3 U7.3 U12.4 U13.4 U17.5 U18.6

## Tracks (layer width: path | path; a pad name or v marks a point on that pad's centre or on a via)
CLK_CRYSTAL_U1_29  (2 unrouted)
CLK_CRYSTAL_U1_30  (2 unrouted)
CLK_CRYSTAL_U3_18  (2 unrouted)
CLK_CRYSTAL_U3_19  (2 unrouted)
CLK_U1_9  (1 unrouted)
CLK_U7_1  (1 unrouted)
GND  (165 unrouted)
NET_U1_31  (2 unrouted)
NET_U1_33  (2 unrouted)
NET_U1_39  (6 unrouted)
NET_U1_42  (2 unrouted)
NET_U1_81  (1 unrouted)
NET_U1_125  (1 unrouted)
NET_U1_166  (1 unrouted)
NET_U1_171  (1 unrouted)
NET_U1_176  (1 unrouted)
NET_U2_1  (1 unrouted)
NET_U2_2  (1 unrouted)
NET_U2_18  (1 unrouted)
NET_U3_15  (1 unrouted)
NET_U3_24  (1 unrouted)
NET_U3_25  (1 unrouted)
NET_U3_31  (1 unrouted)
NET_U3_32  (1 unrouted)
NET_U3_33  (1 unrouted)
NET_U3_34  (1 unrouted)
NET_U3_40  (1 unrouted)
NET_U3_48  (2 unrouted)
NET_U3_59  (2 unrouted)
NET_U3_60  (1 unrouted)
NET_U4_2  (1 unrouted)
NET_U4_3  (1 unrouted)
NET_U4_4  (1 unrouted)
NET_U4_5  (1 unrouted)
NET_U4_6  (4 unrouted)
NET_U4_8  (1 unrouted)
NET_U4_9  (1 unrouted)
NET_U4_10  (1 unrouted)
NET_U4_11  (1 unrouted)
NET_U4_18  (1 unrouted)
NET_U4_19  (1 unrouted)
NET_U5_6  (1 unrouted)
NET_U6_2  (2 unrouted)
NET_U6_3  (2 unrouted)
NET_U7_20  (2 unrouted)
NET_U8_2  (2 unrouted)
NET_U8_5  (2 unrouted)
NET_U9_5  (4 unrouted)
NET_U14_1  (1 unrouted)
NET_U14_6  (2 unrouted)
NET_U14_8  (1 unrouted)
NET_U15_1  (1 unrouted)
NET_U15_6  (2 unrouted)
NET_U15_8  (1 unrouted)
NET_U16_1  (1 unrouted)
NET_U16_6  (2 unrouted)
NET_U16_8  (1 unrouted)
NET_U17_1  (1 unrouted)
NET_U17_6  (2 unrouted)
NET_U17_8  (1 unrouted)
NET_U18_1  (2 unrouted)
NET_U18_3  (2 unrouted)
NET_U18_4  (3 unrouted)
NET_U19_1  (2 unrouted)
PROC_CAN1_RX  (1 unrouted)
PROC_CAN1_TX  (1 unrouted)
PROC_ETH_COL  (1 unrouted)
PROC_ETH_CRS  (1 unrouted)
PROC_ETH_RX_CLK  (1 unrouted)
PROC_ETH_RX_DV  (1 unrouted)
PROC_ETH_RX_ER  (1 unrouted)
PROC_ETH_RXD0  (3 unrouted)
PROC_ETH_RXD1  (1 unrouted)
PROC_ETH_RXD2  (1 unrouted)
PROC_ETH_RXD3  (1 unrouted)
PROC_ETH_TX_CLK  (1 unrouted)
PROC_ETH_TX_EN  (1 unrouted)
PROC_ETH_TXD0  (1 unrouted)
PROC_ETH_TXD1  (1 unrouted)
PROC_ETH_TXD2  (1 unrouted)
PROC_ETH_TXD3  (1 unrouted)
PROC_I2S2_CK  (1 unrouted)
PROC_I2S2_EXT_SD  (1 unrouted)
PROC_I2S2_SD  (1 unrouted)
PROC_I2S2_WS  (2 unrouted)
PROC_SDIO_CK  (2 unrouted)
PROC_SDIO_D0  (2 unrouted)
PROC_SDIO_D1  (2 unrouted)
PROC_SDIO_D2  (2 unrouted)
PROC_SDIO_D3  (2 unrouted)
PROC_SDIO_D4  (2 unrouted)
PROC_SDIO_D5  (2 unrouted)
PROC_SDIO_D6  (2 unrouted)
PROC_SDIO_D7  (2 unrouted)
VCC_S1_12V3  (14 unrouted)
VCC_TIER1_1V1  (16 unrouted)
VCC_TIER1_1V8  (37 unrouted)
VCC_TIER1_2V5  (10 unrouted)
VCC_TIER1_3V3  (70 unrouted)